# Altium PCB AS5047D_Breakout.PcbDoc
Units mil, origin at the board's own origin, x right, y up, seen from the top; angles counter-clockwise.
Board outline 1104.99 x 899.97 mil, 2 copper layers (Top Layer, Bottom Layer); 8 components, 14 nets, 40 pads, 69 vias.
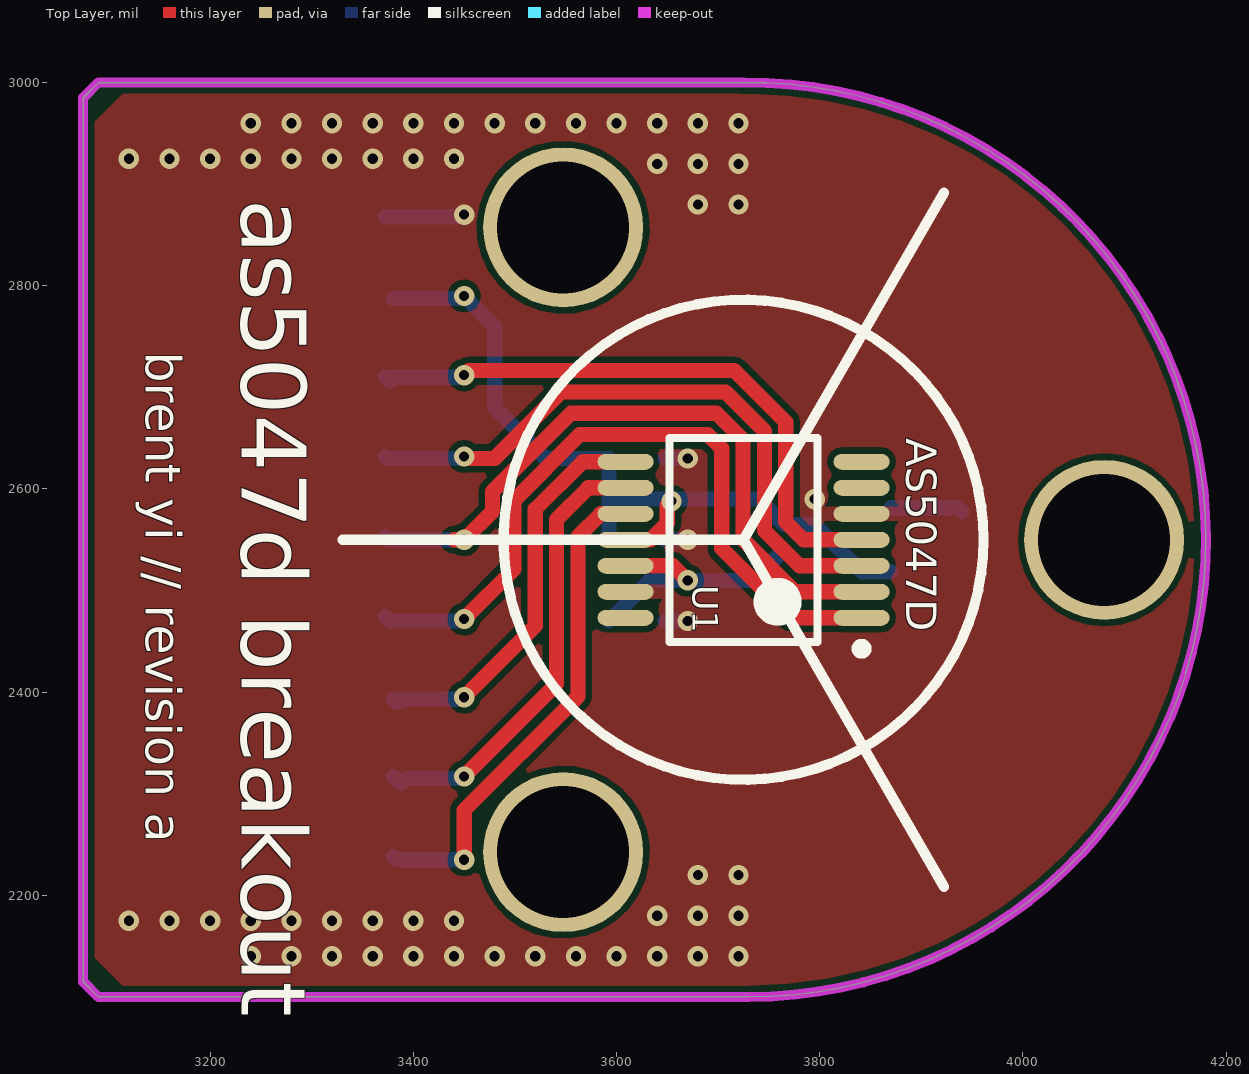
[diagram p0: Top Layer view]
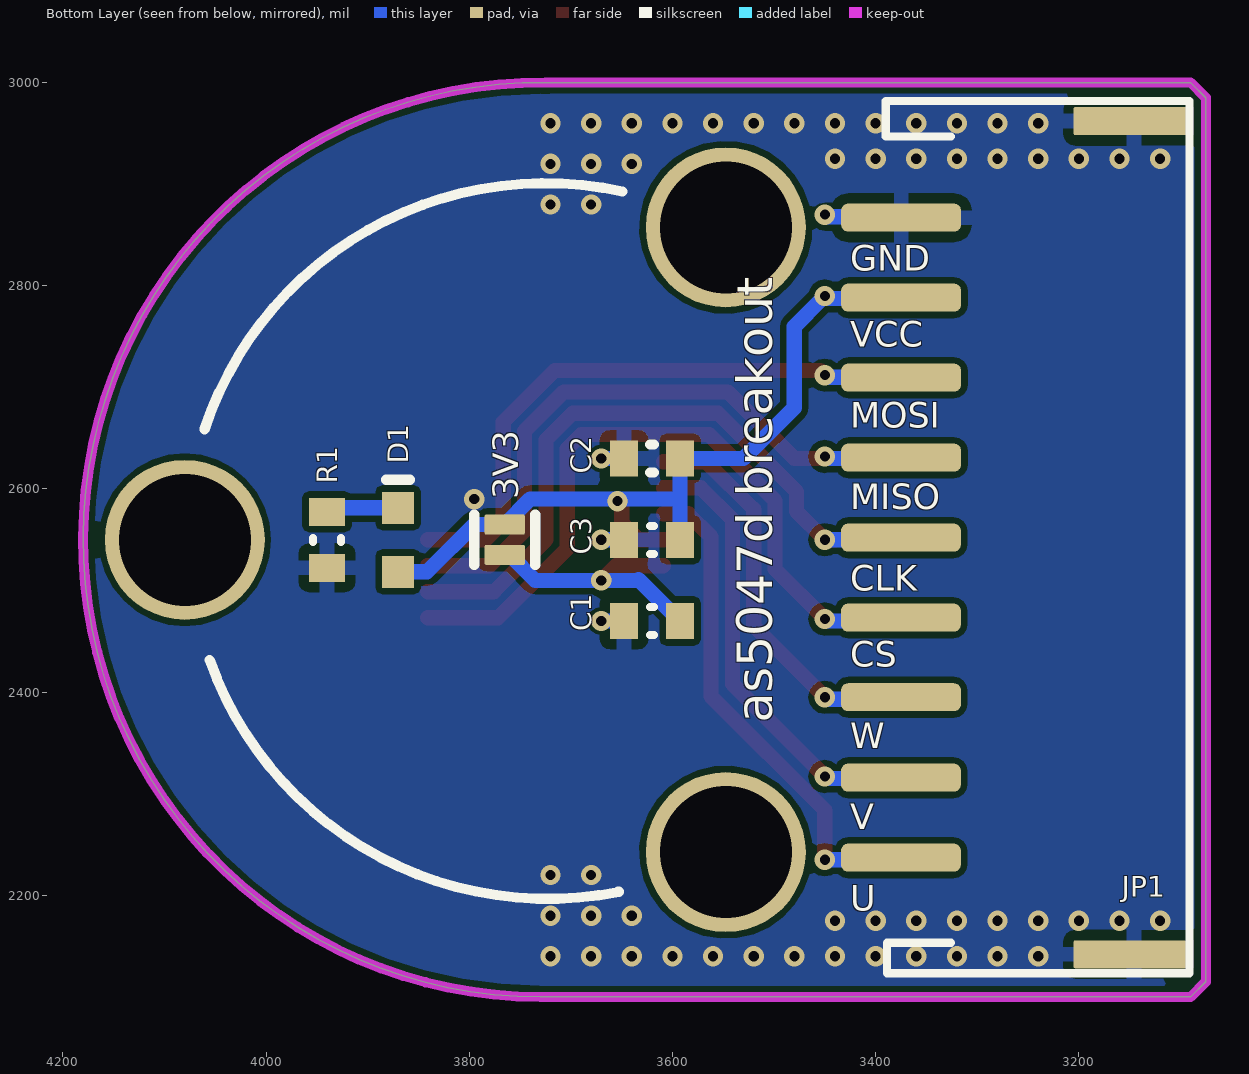
[diagram p1: Bottom Layer view, seen from below]

## Layer stack, top to bottom
Top Solder: solder mask 0.4, Solder Resist, Dk 3.5
Top Layer: signal copper 1.4
Dielectric 1: dielectric 12.6, FR-4, Dk 4.8
Bottom Layer: signal copper 1.4
Bottom Solder: solder mask 0.4, Solder Resist, Dk 3.5

## Board outline
3075,2115 3090,2100 3730,2100 ccw(c3730,2550) 3725.03,2999.97 3089.97,2999.97 3075,2985

## Design rules (kind name [scope] priority, off if disabled: settings)
Clearance [All] p1: gap=6 ignorepadtopadclearanceinfootprint=FALSE except(0: Arc-Hole Track-Hole SMDPad-Hole THPad-Hole Via-Hole Fill-Hole Poly-Hole Region-Hole Text-Hole)
HoleSize [All] p1: absolutevalues=TRUE maxlimit=1000 minlimit=1 maxpercent=80.000 minpercent=20.000
PlaneConnect PlaneConnectVia [IsVia] p1: planeconnectstyle=Direct reliefexpansion=20 reliefentries=4 reliefconductorwidth=10 reliefairgap=10
PlaneConnect [All] p2: planeconnectstyle=Relief reliefexpansion=20 reliefentries=4 reliefconductorwidth=15 reliefairgap=10
PolygonConnect PolygonConnectJST [HasFootprint('JST-4-PTH-RIGHT-ANGLE')] p1: connectstyle=Direct reliefconductorwidth=10 reliefentries=4 polygonreliefangle="90 Angle" airgapwidth=10
PolygonConnect PolygonConnectVia [IsVia] p2: connectstyle=Direct reliefconductorwidth=10 reliefentries=4 polygonreliefangle="90 Angle" airgapwidth=10
PolygonConnect [All] p3: connectstyle=Relief reliefconductorwidth=15 reliefentries=4 polygonreliefangle="90 Angle" airgapwidth=10
RoutingVias [All] p1: holewidth=10 width=20 viastyle="Through Hole" minholewidth=10 minwidth=20 maxholewidth=10 maxwidth=20
SolderMaskExpansion SolderMaskExpansion_1 [IsVia] p1: expansion=1 soldermaskfromhole=TRUE
SolderMaskExpansion [All] p2: expansion=3
Width [All] p1: maxlimit=100 minlimit=15 preferedwidth=15
28 further rules are at their usual default settings.

## Components (designator, comment, footprint, x,y, rotation, side; value= is the part's Value field where it differs from the comment)
3V3 "Solder Jumper" "SOLDER JUMPER" 3765,2550 r270 bottom
C1 "10uF" CAPC0603(1608)100_L 3620,2470 r0 bottom
C2 "0.1uF" CAPC0603(1608)100_L 3620,2630 r180 bottom value=100nF
C3 "2.2uF" CAPC0603(1608)100_L 3620,2550 r180 bottom
D1 "RED" 0603_A 3870,2550 r270 bottom
JP1 "" JST-9-SMD-RIGHT-ANGLE 3206,2867 r270 bottom
R1 "470R" RESC0603(1608)_L 3940,2550 r90 bottom value="470.00 Ohm"
U1 "AS5047D" TSSOP-14 3725,2550 r180 top

## Footprints (in the part's own frame and the unit in brackets; to place one, negate y for a bottom-side part, rotate by r counter-clockwise, add the part's x,y. Pads: shape width x height; smd on the part's side, far side on the other; paste and mask are expansions set on the pad)
0603_A [mm] "Chip LED, 2-Leads, Body 1.6x0.8mm, IPC Medium Density"
  rect 0.8x0.8 smd: 1(-0.8,0) 2(0.8,0)
  silkscreen extent -1.5,-0.3 -1.5,0.3, body extent -0.8,-0.4 0.8,0.4, height 0.7
CAPC0603(1608)100_L [mm] "Chip Capacitor, Body 1.6x0.8mm, Height 1.0mm, IPC High Density"
  rect 0.7x0.9 smd: 1(-0.7,0) 2(0.7,0)
  silkscreen extent -0.05,-0.35 0.05,0.35, body extent -0.87,-0.47 0.88,0.48, height 1
JST-9-SMD-RIGHT-ANGLE [mm]
  rrect10% 0.7x3 smd: 0(-2.413,1.524) 0(18.415,1.524)
  rrect50% 0.7x3 smd: 1(0,-4.289) 2(2,-4.289) 3(4,-4.289) 4(6,-4.289) 5(8,-4.297) 6(10,-4.297) 7(11.989,-4.293) 8(14,-4.297) 9(16,-4.297)
  silkscreen extent -2.92,-4.67 18.89,2.92, body extent -2.95,-5.55 18.95,3.05, height 5.5
RESC0603(1608)_L [mm] "Chip Resistor, Body 1.6x0.8mm, IPC High Density"
  rect 0.7x0.9 smd: 1(-0.7,0) 2(0.7,0)
  silkscreen extent -0.05,-0.35 0.05,0.35, body extent -0.85,-0.47 0.85,0.47, height 0.6
"SOLDER JUMPER" [mil]
  rrect20% 20x40 smd: 1(-15,0) 2(15,0)
  silkscreen extent -25,-30 25,30
TSSOP-14 [mm] "TSOP, 14-Leads, Body 5.00x4.40mm, Pitch 0.65mm, IPC Medium Density"
  oval 1.4x0.4 smd: 1(-2.95,1.95) 2(-2.95,1.3) 3(-2.95,0.65) 4(-2.95,0) 5(-2.95,-0.65) 6(-2.95,-1.3) 7(-2.95,-1.95) 8(2.95,-1.95) 9(2.95,-1.3) 10(2.95,-0.65) 11(2.95,0) 12(2.95,0.65) 13(2.95,1.3) 14(2.95,1.95)
  silkscreen extent -3.08,-2.55 1.85,2.85, body extent -2.25,-2.55 2.25,2.55, height 1.2

## Part data
C1: library part CMP-1035-02796-1, "CAP 10uF 6.3V ±10% 0603 (1608 Metric) Thickness 1mm SMD", Case-EIA=0603, Case-Metric=1608, Rated Voltage="6.3 V", Tolerance=±10%, Max Thickness="1 mm", Technology=SMT
C2: library part CMP-1035-02591-1, "CAP 100nF 50V ±5% 0603 (1608 Metric) Thickness 1mm SMD", Case-EIA=0603, Case-Metric=1608, Rated Voltage="50 V", Tolerance=±5%, Max Thickness="1 mm", Technology=SMT
C3: library part CMP-1035-02767-1, "CAP 2.2uF 25V ±10% 0603 (1608 Metric) Thickness 1mm SMD", Case-EIA=0603, Case-Metric=1608, Rated Voltage="25 V", Tolerance=±10%, Max Thickness="1 mm", Technology=SMT
D1: library part CMP-1426-00001-1, "SMD mono-color Chip LED, WL-SMCW, Red", Color=Red, Manufacturer="Wuerth Elektronik", PartNumber=150060RS75000, ComponentLink1Description="Manufacturer URL", ComponentLink1URL=http://www.we-online.com, ComponentLink2Description=Datasheet, ComponentLink2URL=http://katalog.we-online.com/led/datasheet/150060RS75000.pdf, PackageReference=0603_A
JP1: library part JST-9-SMD-RIGHT-ANGLE, Manufacturer="JST Sales America Inc.", Mounting Technology="Surface Mount", PackageReference=JST-PH
R1: library part CMP-1012-00066-1, "470R 0.1W 5% 0603 (1608 Metric)  SMD", Case-EIA=0603, Case-Metric=1608, Power="0.1 W", Tolerance="5 %", Technology=SMT

## Free pads (board coordinates)
  round 157.48 hole 129.92: 3(3547.5,2242.56) 3(3547.5,2857.44) 3(4080,2550)

## Via types
v1: diameter 20, hole 10, Top Layer to Bottom Layer, 69 vias

## Nets (pads, with @x,y where several pads share a name; then routed paths per layer and width w, separated by ;. In a path a pad name is that pad's centre, name@x,y a point inside that pad or via, vN(x,y) a via of type N, cw(c..) or ccw(c..) an arc to the next point about the centre after c; other vN are vias at no path point)
3V3: 3V3.2 C1.1 U1.12 | length 262.4
  Top Layer w15: U1.12 3655.59,2524.41 v1(3670,2510)
  Bottom Layer w15: C1.1 3633.44,2511 3634.44,2510 v1(3670,2510) 3735,2510 3V3.2@3760,2535
A: U1.7
B: U1.6
CLK: JP1.5 U1.2 | length 673.4
  Top Layer w15: v1@3440,2550 v1(3450,2550) 3478,2578 3478,2597.4 3555.1,2674.5 3698.43,2674.5 3724.5,2648.43 3724.5,2550.2 3775.88,2498.82 U1.2
  Bottom Layer w15: JP1.5@3372.32,2553.26 3375.57,2550 v1(3450,2550)
COMM_U: JP1.9 U1.10 | length 486.7
  Top Layer w15: v1@3450,2240 3450,2283.77 3562,2395.77 3562,2553.05 3584.54,2575.59 U1.10
  Bottom Layer w15: JP1.9@3380.32,2238.3 3383.61,2235 v1(3450,2235)
COMM_V: JP1.8 U1.9 | length 446.1
  Top Layer w15: v1(3450,2317) 3541,2408 3541,2570 3572.18,2601.18 U1.9
  Bottom Layer w15: JP1.8@3380.32,2317.04 3387.35,2310 3392.35,2315 v1@3450,2315
COMM_W: JP1.7 U1.8 | length 395
  Top Layer w15: v1(3450,2395) 3520,2465 3520,2580 3566.77,2626.77 U1.8
  Bottom Layer w15: JP1.7@3380,2393.78 3383.78,2390 3386.78,2393 v1@3450,2393
CS: JP1.6 U1.1 | length 717.8
  Top Layer w15: v1(3450,2472) 3499,2521 3499,2588.7 3563.8,2653.5 3689.73,2653.5 3703.5,2639.73 3703.5,2541.5 3771.77,2473.23 U1.1
  Bottom Layer w15: JP1.6@3372.32,2474.52 3376.83,2470 v1@3450,2470
GND: C1.2 C2.1 C3.1 JP1.0 JP1.1 R1.1 U1.5 U1.13 | length 145.4
  Bottom Layer w15: JP1.1@3372,2868.22 3372.22,2868 v1@3450,2868 ; C1.2 v1(3670,2470) ; C3.1 v1(3670,2550) ; C2.1 v1(3670,2630)
  other v1: 3240,2140 3280,2140 3320,2140 3360,2140 3400,2140 3440,2140 3480,2140 3520,2140 3560,2140 3600,2140 3640,2140 3680,2140 3720,2140 3120,2175 3160,2175 3200,2175 3240,2175 3280,2175 3320,2175 3360,2175 3400,2175 3440,2175 3640,2180 3680,2180 3720,2180 3680,2220 3720,2220 3795,2590 3450,2870 3680,2880 3720,2880 3640,2920 3680,2920 3720,2920 3120,2925 3160,2925 3200,2925 3240,2925 3280,2925 3320,2925 3360,2925 3400,2925 3440,2925 3240,2960 3280,2960 3320,2960 3360,2960 3400,2960 3440,2960 3480,2960 3520,2960 3560,2960 3600,2960 3640,2960 3680,2960 3720,2960
I: U1.14
MISO: JP1.4 U1.3 | length 625.5
  Top Layer w15: v1@3450,2630 3480,2630 3545.5,2695.5 3707.13,2695.5 3745.5,2657.13 3745.5,2558.9 3779.99,2524.41 U1.3
  Bottom Layer w15: JP1.4@3372,2632 3374,2630 v1@3450,2630
  other v1: 3450,2632
MOSI: JP1.3 U1.4 | length 601.1
  Top Layer w15: v1(3450,2712) 3454.5,2716.5 3715.83,2716.5 3766.5,2665.83 3766.5,2567.6 3784.1,2550 U1.4
  Bottom Layer w15: JP1.3@3372,2710.74 3376.74,2706 3380.74,2710 v1@3450,2710
NetD1_1: D1.1 R1.2 | length 71.6
  Bottom Layer w15: D1.1 3936.06,2581.5 R1.2
VCC: 3V3.1 C2.2 C3.2 D1.2 JP1.2 U1.11 | length 782.7
  Top Layer w15: U1.11 3633.18,2550 3649.92,2566.74 3649.92,2583.92 v1(3654,2588)
  Bottom Layer w15: JP1.2@3380,2787.48 3452.52,2787.48 3480,2760 3480,2680 3530,2630 C2.2 3592.44,2590 ; C3.2 3592.44,2590 ; D1.2 3841.5,2518.5 3795,2565 3V3.1 3740,2590 3592.44,2590
  other v1: 3450,2790

## Polygon pours and split planes (outlines as drawn)
GND on Bottom Layer "Bottom" (solid, remove dead copper, pour order 1): 3075,2150 3125,2100 3730,2100 ccw(c3730,2550) 3725.03,2999.97 3124.97,2999.97 3115,2990 3075,2950
GND on Top Layer "Top" (solid, remove dead copper, pour order 0): 3075,2150 3125,2100 3730,2100 ccw(c3730,2550) 3725.03,2999.97 3124.97,2999.97 3115,2990 3075,2950

## Keep-outs
Keep-Out Layer:
  the board outline again, w10

## Silkscreen, mask and mechanical layers (free items; w line width, h text height)
Top Overlay:
  circle w10: c3725,2550 r236.22
  lines w10: 3330.55,2550 3725,2550 ; 3922.22,2208.4 3725,2550 ; 3922.22,2891.6 3725,2550
  text "as5047d breakout" at 3210,2885 h110 r270
  text "brent yi // revision a" at 3125,2735 h60 r270
  text "AS5047D" at 3885,2650 h30 r270
Bottom Overlay:
  lines w10: 3649.39,2892.77 cw(c3725,2547.5) 4060.56,2658.53 ; 3653.5,2203.5 3652.72,2203.5 ccw(c3722.5,2550) 4055.53,2431.59
  text "GND" at 3425,2815 h25
  text "VCC" at 3425,2740 h25
  text "MOSI" at 3425,2660 h25
  text "MISO" at 3425,2580 h25
  text "CLK" at 3425,2500 h25
  text "CS" at 3425,2425 h25
  text "as5047d breakout" at 3490,2370 h60 r270
  text "W" at 3425,2345 h25
  text "V" at 3425,2265 h25
  text "U" at 3425,2185 h25